# Altium PCB Copy of PCB1.PcbDoc (part 4 of 9)
Units mm, origin at the board's own origin, x right, y up, seen from the top; angles counter-clockwise.
Board outline 100 x 100 mm, 6 copper layers (Top Layer, Int1 (GND), Int2 (Sign), Int3 (Sign), Int4 (PWR), Bottom Layer), stack 1.538 mm thick; 614 components, 712 nets, 3013 pads, 501 vias.
Unrouted connection lines stored in the file: 259.
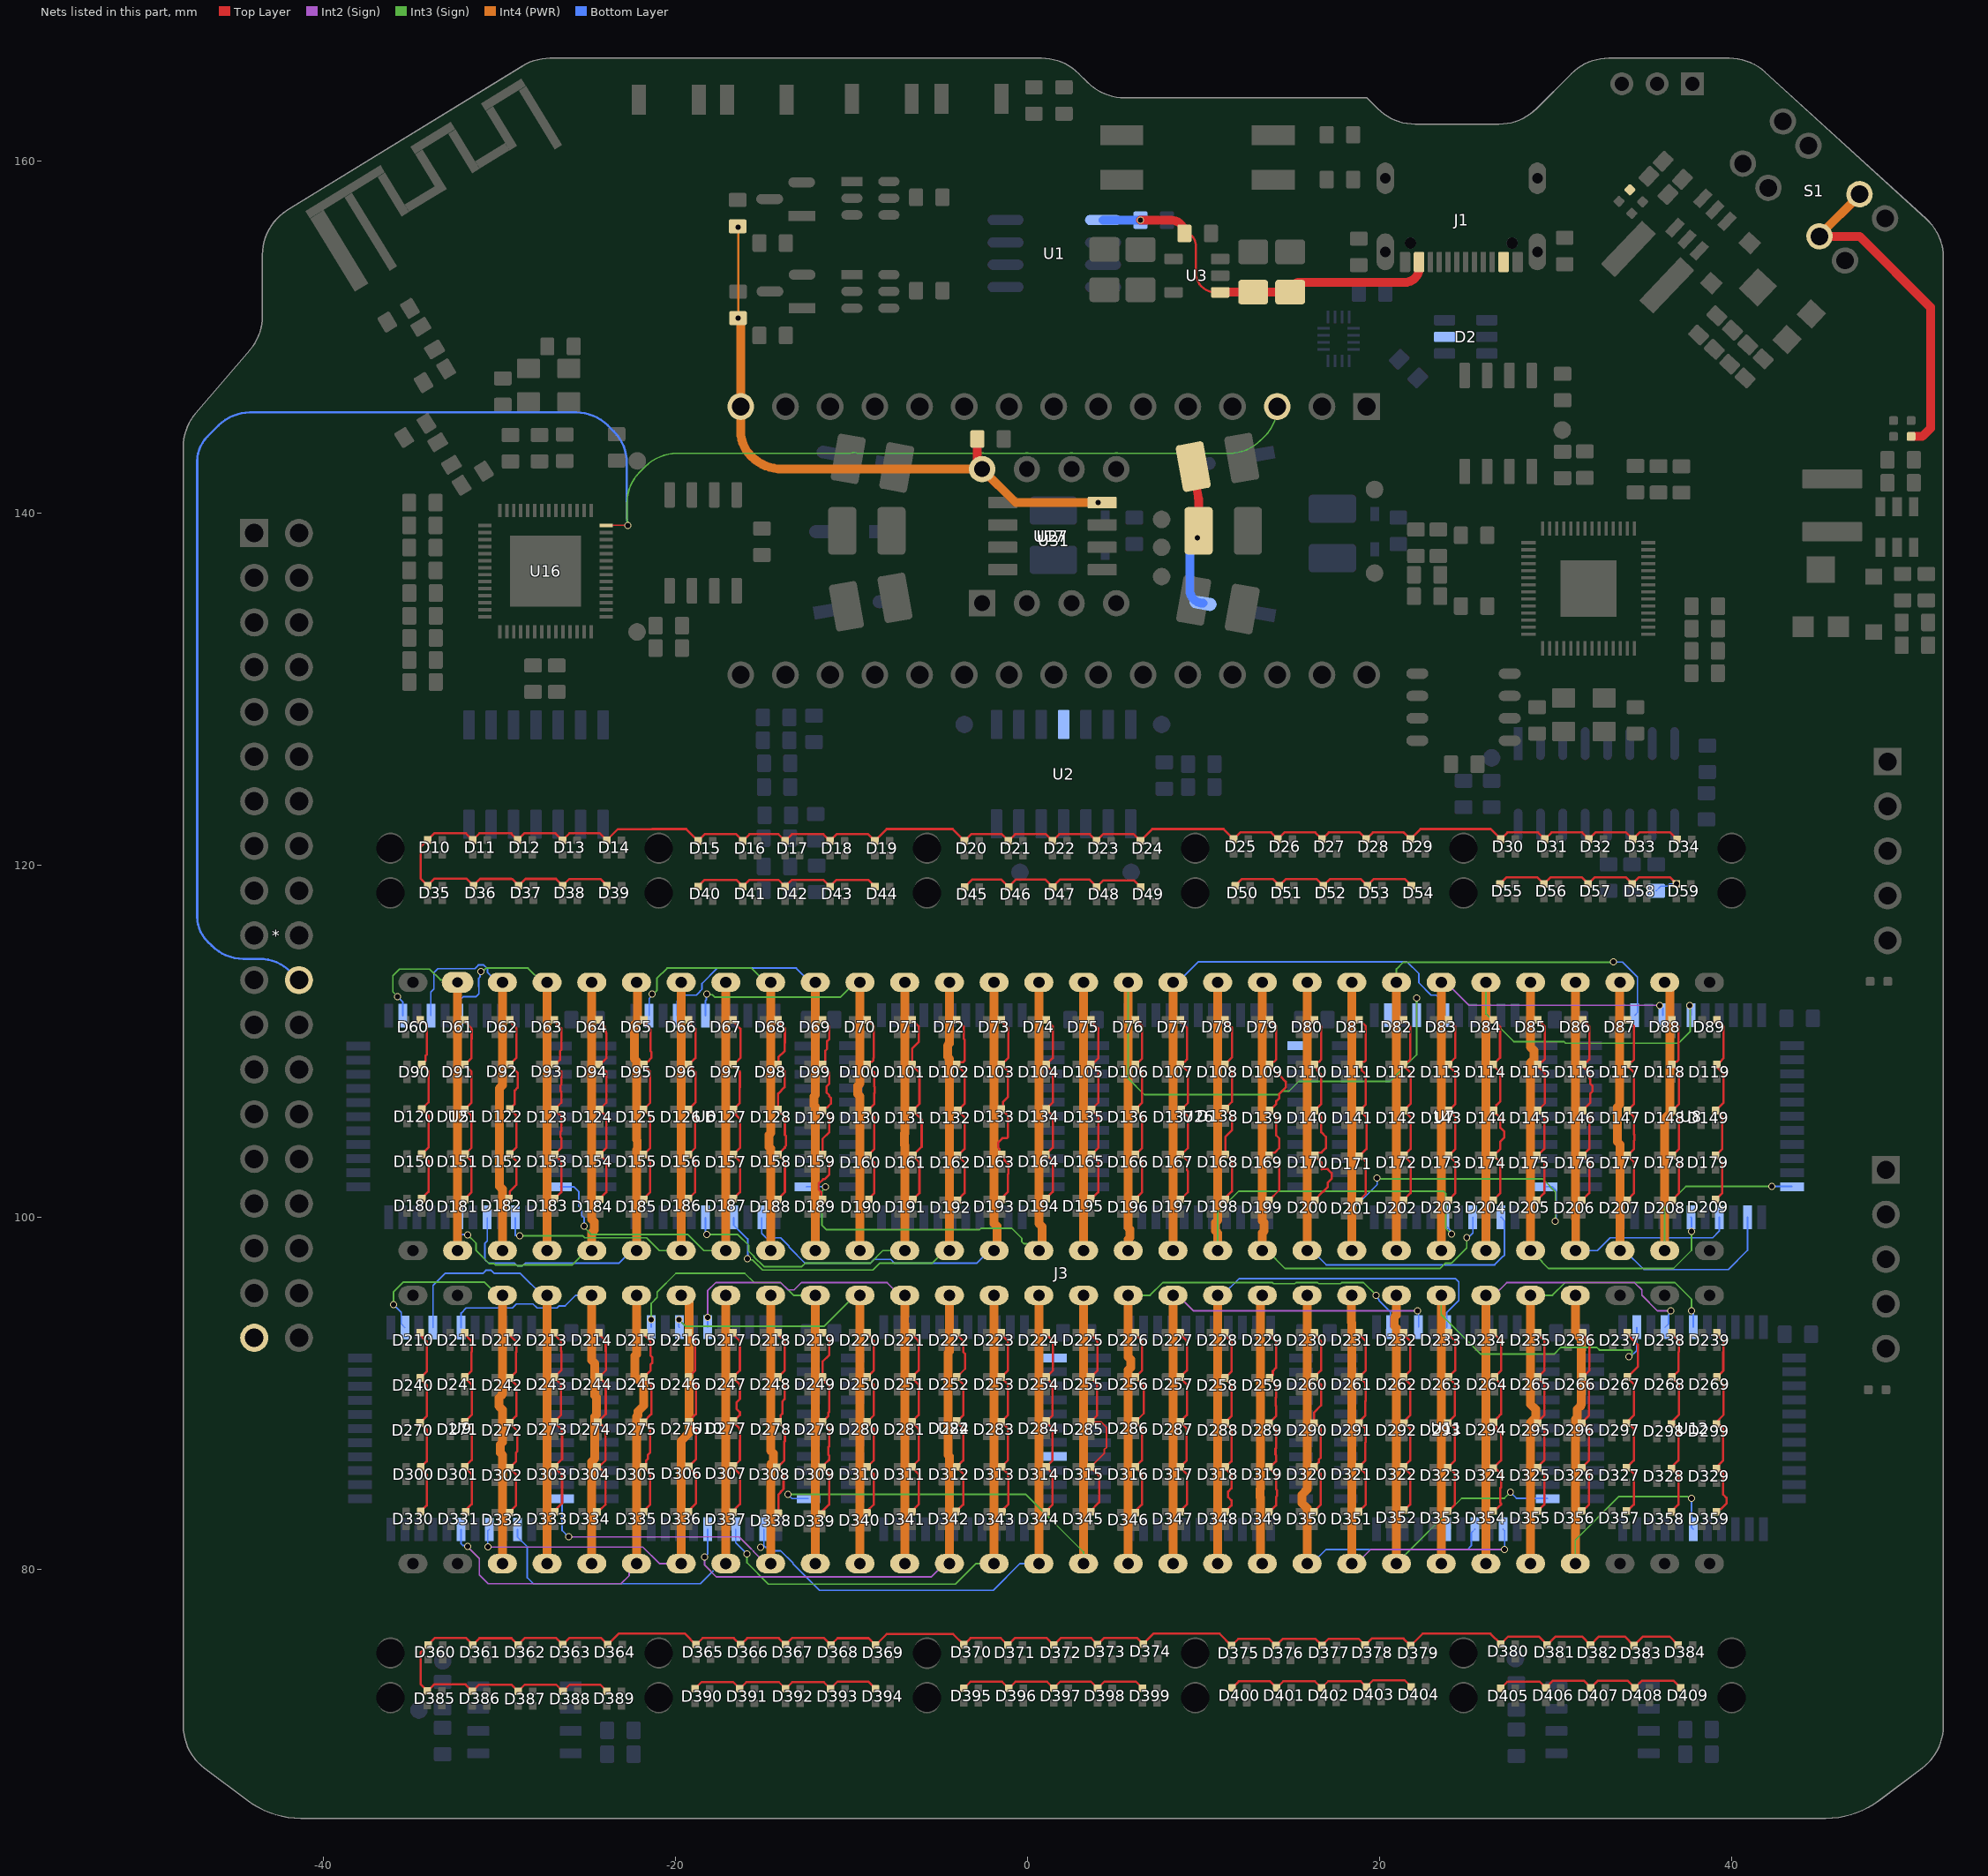
[diagram p7: the nets of this part, all layers, seen from the top]

## Via types
v1: diameter 0.4, hole 0.3, Top Layer to Bottom Layer, tented both sides, 494 vias
v2: diameter 0.4, hole 0.3, Top Layer to Bottom Layer, 5 vias
v3: diameter 0.4, hole 0.3, Top Layer to Bottom Layer, tented top, 1 vias
v4: diameter 0.6, hole 0.5, Top Layer to Bottom Layer, 1 vias

## Nets (pads, with @x,y where several pads share a name; then routed paths per layer and width w, separated by ;. In a path a pad name is that pad's centre, name@x,y a point inside that pad or via, vN(x,y) a via of type N, cw(c..) or ccw(c..) an arc to the next point about the centre after c; other vN are vias at no path point) (continued)
ANALOG_5V: *.37 C1.2 C2.2 C20.2 C21.2 C45.2 D2.5 D5.2 D10.2 D11.2 D12.2 D13.2 D14.2 D15.2 D16.2 D17.2 D18.2 D19.2 D20.2 D21.2 D22.2 D23.2 D24.2 D25.2 D26.2 D27.2 D28.2 D29.2 D30.2 D31.2 D32.2 D33.2 D34.2 D35.2 D36.2 D37.2 D38.2 D39.2 D40.2 D41.2 D42.2 D43.2 D44.2 D45.2 D46.2 D47.2 D48.2 D49.2 D50.2 D51.2 D52.2 D53.2 D54.2 D55.2 D56.2 D57.2 D58.2 D59.2 D60.2 D61.2 D62.2 D63.2 D64.2 D65.2 D66.2 D67.2 D68.2 D69.2 D70.2 D71.2 D72.2 D73.2 D74.2 D75.2 D76.2 D77.2 D78.2 D79.2 D80.2 D81.2 D82.2 D83.2 D84.2 D85.2 D86.2 D87.2 D88.2 D89.2 D90.2 D91.2 D92.2 D93.2 D94.2 D95.2 D96.2 D97.2 D98.2 D99.2 D100.2 D101.2 D102.2 D103.2 D104.2 D105.2 D106.2 D107.2 D108.2 D109.2 D110.2 D111.2 D112.2 D113.2 D114.2 D115.2 D116.2 D117.2 D118.2 D119.2 D120.2 D121.2 D122.2 D123.2 D124.2 D125.2 D126.2 D127.2 D128.2 D129.2 D130.2 D131.2 D132.2 D133.2 D134.2 D135.2 D136.2 D137.2 D138.2 D139.2 D140.2 D141.2 D142.2 D143.2 D144.2 D145.2 D146.2 D147.2 D148.2 D149.2 D150.2 D151.2 D152.2 D153.2 D154.2 D155.2 D156.2 D157.2 D158.2 D159.2 D160.2 D161.2 D162.2 D163.2 D164.2 D165.2 D166.2 D167.2 D168.2 D169.2 D170.2 D171.2 D172.2 D173.2 D174.2 D175.2 D176.2 D177.2 D178.2 D179.2 D180.2 D181.2 D182.2 D183.2 D184.2 D185.2 D186.2 D187.2 D188.2 D189.2 D190.2 D191.2 D192.2 D193.2 D194.2 D195.2 D196.2 D197.2 D198.2 D199.2 D200.2 D201.2 D202.2 D203.2 D204.2 D205.2 D206.2 D207.2 D208.2 D209.2 D210.2 D211.2 D212.2 D213.2 D214.2 D215.2 D216.2 D217.2 D218.2 D219.2 D220.2 D221.2 D222.2 D223.2 D224.2 D225.2 D226.2 D227.2 D228.2 D229.2 D230.2 D231.2 D232.2 D233.2 D234.2 D235.2 D236.2 D237.2 D238.2 D239.2 D240.2 D241.2 D242.2 D243.2 D244.2 D245.2 D246.2 D247.2 D248.2 D249.2 D250.2 D251.2 D252.2 D253.2 D254.2 D255.2 D256.2 D257.2 D258.2 D259.2 D260.2 D261.2 D262.2 D263.2 D264.2 D265.2 D266.2 D267.2 D268.2 D269.2 D270.2 D271.2 D272.2 D273.2 D274.2 D275.2 D276.2 D277.2 D278.2 D279.2 D280.2 D281.2 D282.2 D283.2 D284.2 D285.2 D286.2 D287.2 D288.2 D289.2 D290.2 D291.2 D292.2 D293.2 D294.2 D295.2 D296.2 D297.2 D298.2 D299.2 D300.2 D301.2 D302.2 D303.2 D304.2 D305.2 D306.2 D307.2 D308.2 D309.2 D310.2 D311.2 D312.2 D313.2 D314.2 D315.2 D316.2 D317.2 D318.2 D319.2 D320.2 D321.2 D322.2 D323.2 D324.2 D325.2 D326.2 D327.2 D328.2 D329.2 D330.2 D331.2 D332.2 D333.2 D334.2 D335.2 D336.2 D337.2 D338.2 D339.2 D340.2 D341.2 D342.2 D343.2 D344.2 D345.2 D346.2 D347.2 D348.2 D349.2 D350.2 D351.2 D352.2 D353.2 D354.2 D355.2 D356.2 D357.2 D358.2 D359.2 D360.2 D361.2 D362.2 D363.2 D364.2 D365.2 D366.2 D367.2 D368.2 D369.2 D370.2 D371.2 D372.2 D373.2 D374.2 D375.2 D376.2 D377.2 D378.2 D379.2 D380.2 D381.2 D382.2 D383.2 D384.2 D385.2 D386.2 D387.2 D388.2 D389.2 D390.2 D391.2 D392.2 D393.2 D394.2 D395.2 D396.2 D397.2 D398.2 D399.2 D400.2 D401.2 D402.2 D403.2 D404.2 D405.2 D406.2 D407.2 D408.2 D409.2 J1.A4B9 J1.B4A9 JP2.2 JP4.2 R4.1 R12.1 R26.2 R48.1 R50.1 S1.2 S1.6 U1.1 U2.4 U3.1 U17.8 U24.1 U26.1 U27.8 U31.15 | length 1060
  Top Layer w0.09: R50.1@-16.462,151.094 v1(-16.448,151.094) ; D315.2@3.583,85.823 4.34,86.58 4.34,86.803 4.478,86.941 4.478,88.056 4.15,88.383 D285.2@3.583,88.383
  Top Layer w0.127: D210.2@-34.617,93.406 -34.152,92.94 -34.152,92.898 -34.139,92.885 -34.139,92.357 -34.152,92.344 -34.152,91.236 -34.53,90.858 -34.152,90.479 -34.152,88.711 D270.2@-34.53,88.333 -34.152,87.954 -34.152,86.146 -34.53,85.768 -34.152,85.389 -34.152,83.636 D330.2@-34.53,83.258 ; D60.2@-34.517,111.231 -34.139,110.852 -34.139,109.26 -34.226,109.173 -34.226,108.888 D90.2@-34.43,108.683 -34.052,108.304 -34.052,106.536 D120.2@-34.43,106.158 -34.052,105.779 -34.052,103.971 D150.2@-34.43,103.593 -34.052,103.214 -34.052,101.461 D180.2@-34.43,101.083 ; D211.2@-32.077,93.456 -31.592,92.971 -31.592,92.363 -31.605,92.35 -31.605,91.293 -31.99,90.908 -31.592,90.51 -31.592,88.781 -31.99,88.383 -31.592,87.985 -31.592,86.216 -31.99,85.818 -31.592,85.42 -31.592,83.706 D331.2@-31.99,83.308 ; D61.2@-32.067,111.216 -31.602,110.75 -31.602,110.668 -31.599,110.665 -31.599,110.137 -31.602,110.134 -31.602,109.046 -31.98,108.668 -31.602,108.289 -31.602,106.521 D121.2@-31.98,106.143 -31.602,105.764 -31.602,103.956 -31.98,103.578 -31.602,103.199 -31.602,101.446 D181.2@-31.98,101.068 ; D212.2@-29.537,93.406 -29.072,92.94 -29.072,92.898 -29.059,92.885 -29.059,92.357 -29.072,92.344 -29.072,91.236 -29.45,90.858 -29.076,90.483 -29.076,90.334 -29.059,90.317 -29.059,88.724 -29.45,88.333 -29.007,87.889 -29.007,86.705 -29.072,86.64 -29.072,86.146 -29.45,85.768 -29.072,85.389 -29.072,83.636 D332.2@-29.45,83.258 ; D62.2@-29.528,111.231 -29.062,110.765 -29.062,110.668 -29.059,110.665 -29.059,110.137 -29.062,110.134 -29.062,109.061 -29.441,108.683 -28.982,108.224 -28.982,107.375 -29.152,107.205 -29.152,106.446 D122.2@-29.441,106.158 -29.071,105.788 -29.071,105.601 -29.062,105.592 -29.062,103.971 -29.441,103.593 D152.2@-29.437,103.593 -29.057,103.212 -29.057,101.851 -29.164,101.744 ; D182.2@-29.441,101.083 -29.422,101.101 -29.422,101.486 -29.164,101.744 ; D213.2@-26.997,93.456 -26.532,92.99 -26.532,92.948 -26.519,92.935 -26.519,92.407 -26.506,92.394 -26.506,91.312 -26.91,90.908 -26.532,90.529 -26.532,88.761 -26.91,88.383 -26.46,87.933 -26.46,86.268 -26.91,85.818 -26.46,85.368 -26.46,83.758 D333.2@-26.91,83.308 ; D63.2@-26.967,111.206 -26.502,110.74 -26.502,109.519 -26.583,109.438 -26.583,108.955 -26.88,108.658 -26.502,108.279 -26.502,107.531 -26.538,107.495 -26.538,107.171 -26.502,107.135 -26.502,106.511 D123.2@-26.88,106.133 -26.502,105.754 -26.502,104.908 -26.538,104.872 -26.538,104.548 -26.502,104.512 -26.502,103.946 -26.88,103.568 -26.502,103.189 -26.502,101.436 D183.2@-26.88,101.058 ; D214.2@-24.457,93.456 -23.992,92.99 -23.992,92.948 -23.979,92.935 -23.979,92.407 -23.966,92.394 -23.966,91.312 -24.37,90.908 -24.332,90.908 -23.979,90.554 -23.979,88.824 -24.37,88.433 -24.37,88.383 -23.992,88.004 -23.992,86.196 -24.37,85.818 -24.086,85.533 -24.086,85.381 -23.992,85.287 -23.992,83.686 D334.2@-24.37,83.308 ; D64.2@-24.417,111.206 -24.049,110.837 -24.049,110.734 -23.979,110.665 -23.979,110.494 -23.952,110.467 -23.952,109.036 -24.33,108.658 -23.952,108.279 -23.952,106.511 D124.2@-24.33,106.133 -23.952,105.754 -23.952,103.946 -24.33,103.568 -23.952,103.189 -23.952,101.436 D184.2@-24.33,101.058 ; D389.2@-23.91,73.081 -24.281,73.451 -26.032,73.451 D388.2@-26.41,73.073 -26.789,73.451 -28.582,73.451 D387.2@-28.96,73.073 -29.347,73.459 -31.182,73.459 D386.2@-31.56,73.081 -31.95,73.47 -33.733,73.47 D385.2@-34.111,73.092 -34.49,73.47 -34.49,75.292 D360.2@-34.07,75.712 -33.672,76.11 -31.922,76.11 D361.2@-31.528,75.716 -31.15,76.095 -29.339,76.095 D362.2@-28.96,75.716 -28.567,76.11 -26.808,76.11 D363.2@-26.42,75.723 -26.033,76.11 -24.258,76.11 D364.2@-23.87,75.723 -23.247,76.346 -19.477,76.346 D365.2@-18.856,75.726 -18.478,76.104 -16.702,76.104 D366.2@-16.32,75.723 -15.942,76.101 -14.149,76.101 D367.2@-13.77,75.723 -13.392,76.101 -11.571,76.101 D368.2@-11.185,75.715 -10.806,76.094 -9.043,76.094 D369.2@-8.65,75.7 -8.016,76.334 -4.245,76.334 D370.2@-3.629,75.718 -3.25,76.096 -1.53,76.096 D371.2@-1.132,75.698 -0.733,76.096 1.079,76.096 D372.2@1.475,75.7 1.871,76.096 3.606,76.096 D373.2@3.964,75.739 4.342,76.117 6.208,76.117 D374.2@6.559,75.766 7.14,76.346 10.901,76.346 D375.2@11.576,75.671 11.955,76.049 13.718,76.049 D376.2@14.096,75.671 14.475,76.049 16.351,76.049 D377.2@16.715,75.685 17.093,76.064 18.797,76.064 D378.2@19.16,75.7 19.539,76.079 21.349,76.079 D379.2@21.757,75.671 22.432,76.346 26.287,76.346 D380.2@26.873,75.761 27.297,76.185 29.04,76.185 D381.2@29.51,75.715 29.98,76.185 31.485,76.185 D382.2@31.97,75.7 32.455,76.185 33.915,76.185 D383.2@34.43,75.67 34.945,76.185 36.47,76.185 D384.2@36.94,75.716 ; D39.2@-23.906,118.851 -24.285,119.229 -26.048,119.229 D38.2@-26.426,118.851 -26.809,119.234 -28.541,119.234 D37.2@-28.919,118.855 -29.294,119.229 -29.339,119.229 -29.344,119.234 -31.116,119.234 D36.2@-31.495,118.855 -31.89,119.25 -33.701,119.25 D35.2@-34.1,118.851 -34.5,119.25 -34.5,121.041 D10.2@-34.1,121.441 -33.722,121.819 -31.916,121.819 D11.2@-31.537,121.441 -31.159,121.819 -29.339,121.819 -29.339,121.793 D12.2@-28.987,121.441 -28.609,121.819 -26.826,121.819 D13.2@-26.437,121.43 -26.048,121.819 -24.306,121.819 D14.2@-23.917,121.43 -23.292,122.055 -21.356,122.055 -21.345,122.066 -19.413,122.066 D15.2@-18.737,121.391 -18.359,121.769 -16.566,121.769 D16.2@-16.187,121.391 -15.809,121.769 -14.166,121.769 D17.2@-13.787,121.391 -13.409,121.769 -11.616,121.769 D18.2@-11.237,121.391 -10.859,121.769 -9.066,121.769 D19.2@-8.687,121.391 -8.012,122.066 -4.273,122.066 D20.2@-3.597,121.391 -3.219,121.769 -1.476,121.769 D21.2@-1.097,121.391 -0.719,121.769 1.027,121.769 D22.2@1.406,121.391 1.784,121.769 3.524,121.769 D23.2@3.903,121.391 4.281,121.769 6.024,121.769 D24.2@6.403,121.391 7.078,122.066 11.117,122.066 D25.2@11.693,121.491 12.071,121.869 13.827,121.869 D26.2@14.205,121.491 14.584,121.869 16.339,121.869 D27.2@16.718,121.491 17.096,121.869 18.852,121.869 D28.2@19.23,121.491 19.609,121.869 21.351,121.869 21.36,121.86 21.373,121.86 D29.2@21.743,121.491 22.318,122.066 26.3,122.066 D30.2@26.875,121.491 27.254,121.87 28.997,121.87 D31.2@29.375,121.491 29.754,121.87 31.497,121.87 D32.2@31.875,121.491 32.254,121.87 33.997,121.87 D33.2@34.375,121.491 34.754,121.87 36.499,121.87 D34.2@36.886,121.483 ; D215.2@-21.917,93.456 -21.452,92.99 -21.452,92.948 -21.439,92.935 -21.439,92.407 -21.426,92.394 -21.426,92.14 -21.346,92.06 -21.346,91.736 -21.426,91.656 -21.426,91.312 -21.83,90.908 -21.666,90.743 -21.666,90.722 -21.437,90.494 -21.416,90.494 -21.395,90.473 -21.395,88.818 -21.83,88.383 -21.452,88.004 -21.452,86.642 -21.579,86.515 -21.579,86.292 -21.679,86.192 -21.679,85.969 -21.83,85.818 -21.452,85.439 -21.452,83.686 D335.2@-21.83,83.308 ; D65.2@-21.917,111.206 -21.513,110.801 -21.513,110.739 -21.439,110.665 -21.439,109.454 -21.379,109.395 -21.379,109.071 -21.608,108.842 -21.666,108.842 D95.2@-21.817,108.691 -21.83,108.678 -21.83,108.658 -21.452,108.279 -21.452,106.511 D125.2@-21.83,106.133 -21.452,105.754 -21.452,103.946 -21.83,103.568 -21.452,103.189 -21.452,101.436 D185.2@-21.83,101.058 ; D216.2@-19.377,93.456 -18.912,92.99 -18.912,92.948 -18.899,92.935 -18.899,91.299 -19.29,90.908 -18.855,90.473 -18.855,88.818 -19.29,88.383 -18.855,87.947 -18.855,86.253 -19.29,85.818 -18.855,85.383 -18.855,83.743 D336.2@-19.29,83.308 ; D66.2@-19.367,111.206 -18.885,110.724 -18.885,109.053 -19.28,108.658 -18.885,108.263 -18.885,106.528 D126.2@-19.28,106.133 -18.902,105.754 -18.902,103.946 -19.28,103.568 -18.902,103.189 -18.902,101.436 D186.2@-19.28,101.058 ; D390.2@-18.91,73.223 -18.532,73.601 -16.739,73.601 D391.2@-16.36,73.223 -15.982,73.601 -14.139,73.601 D392.2@-13.76,73.223 -13.382,73.601 -11.589,73.601 D393.2@-11.21,73.223 -10.806,73.627 -9.065,73.627 D394.2@-8.66,73.223 ; D40.2@-18.737,118.801 -18.359,119.179 -16.566,119.179 D41.2@-16.187,118.801 -15.809,119.179 -14.166,119.179 D42.2@-13.787,118.801 -13.409,119.179 -11.616,119.179 D43.2@-11.237,118.801 -10.859,119.179 -9.066,119.179 D44.2@-8.687,118.801 ; D217.2@-16.837,93.456 -16.372,92.99 -16.372,92.948 -16.359,92.935 -16.359,91.299 -16.75,90.908 -16.359,90.516 -16.359,89.681 -16.555,89.485 -16.555,89.135 -16.359,88.939 -16.359,88.774 -16.75,88.383 -16.359,87.991 -16.359,87.874 -16.352,87.867 -16.352,87.339 -16.359,87.332 -16.359,86.209 -16.75,85.818 -16.352,85.419 -16.352,83.706 D337.2@-16.75,83.308 ; D67.2@-16.817,111.206 -16.324,110.713 -16.324,109.064 -16.546,108.842 -16.586,108.842 -16.73,108.698 -16.73,108.658 -16.377,108.304 -16.377,108.269 -16.359,108.251 -16.359,107.395 -16.363,107.391 -16.363,106.5 D127.2@-16.73,106.133 -16.579,105.981 -16.579,105.819 -16.352,105.592 -16.352,103.946 -16.73,103.568 -16.352,103.189 -16.352,103.008 -16.347,103.003 -16.347,102.476 -16.352,102.471 -16.352,101.436 D187.2@-16.73,101.058 ; D218.2@-14.297,93.456 -13.832,92.99 -13.832,92.948 -13.819,92.935 -13.819,92.407 -13.806,92.394 -13.806,91.312 -14.21,90.908 -14.172,90.908 -13.819,90.554 -13.819,90.367 -13.819,89.672 -13.951,89.54 -13.951,88.845 -14.029,88.767 -14.029,88.534 D278.2@-14.18,88.383 -13.884,88.087 -13.884,87.899 -13.802,87.817 -13.802,87.289 -13.832,87.259 -13.832,86.196 -14.21,85.818 -14.21,85.765 -13.876,85.431 -13.876,84.573 -14.028,84.422 -14.028,84.386 -14.176,84.239 -14.176,83.345 -14.21,83.31 D338.2@-14.21,83.308 ; D68.2@-14.267,111.206 -13.802,110.74 -13.802,109.916 -13.824,109.895 -13.824,109.44 -14.168,109.096 -14.168,108.661 -13.819,108.312 -13.819,107.395 -14.18,107.034 D128.2@-14.18,106.133 -14.029,105.981 -14.029,105.916 -13.802,105.689 -13.802,104.685 -13.734,104.618 -13.734,104.083 -13.802,104.015 -13.802,103.961 D158.2@-14.18,103.583 -14.18,103.568 -13.802,103.189 -13.802,101.436 D188.2@-14.18,101.058 ; D339.2@-11.67,83.308 -11.292,83.686 -11.292,85.439 -11.293,85.44 -11.303,85.44 -11.531,85.669 -11.531,85.679 -11.67,85.818 -11.531,85.957 -11.531,85.993 -11.303,86.221 -11.279,86.221 -11.279,86.466 -11.323,86.51 -11.323,86.957 -11.279,87.001 -11.279,87.991 -11.67,88.383 -11.323,88.73 -11.323,88.917 -11.292,88.948 -11.292,89.826 -11.279,89.839 -11.279,90.372 -11.378,90.472 -11.378,90.506 -11.506,90.634 -11.506,90.781 D249.2@-11.657,90.933 -11.657,91.813 -11.279,92.192 -11.279,93.072 D219.2@-11.657,93.451 ; D69.2@-11.657,111.231 -11.275,110.849 -11.275,110.384 -11.279,110.38 -11.279,110.137 -11.404,110.012 -11.404,109.571 -11.506,109.469 -11.506,108.842 -11.654,108.694 -11.654,108.599 -11.318,108.263 ; D189.2@-11.654,100.999 -11.737,101.082 -11.737,101.438 -11.886,101.586 -11.886,101.91 -11.621,102.174 -11.54,102.174 -11.275,102.438 -11.275,103.13 -11.657,103.512 -11.657,104.467 -11.275,104.849 -11.275,105.695 D129.2@-11.654,106.074 -11.492,106.235 -11.414,106.235 -11.185,106.464 -11.185,106.787 -11.275,106.877 -11.275,106.939 -11.44,107.104 -11.44,107.428 -11.275,107.593 -11.275,108.087 ccw(c-11.402,108.087) -11.277,108.106 cw(c-10.891,108.166) -11.281,108.171 ccw(c-11.408,108.174) -11.318,108.263 ; D220.2@-9.217,93.456 -8.752,92.99 -8.752,92.948 -8.739,92.935 -8.739,91.299 -9.13,90.908 -8.752,90.529 -8.752,88.761 D280.2@-9.13,88.383 -8.752,88.004 -8.752,86.196 -9.13,85.818 -8.752,85.439 -8.752,83.686 D340.2@-9.13,83.308 ; D70.2@-9.117,111.231 -8.739,110.852 -8.739,109.079 -8.774,109.044 -8.774,108.919 -8.851,108.842 -8.966,108.842 -9.094,108.714 -9.094,108.599 -8.716,108.22 -8.716,107.432 -8.69,107.407 -8.69,107.083 -8.716,107.057 -8.716,106.452 D130.2@-9.094,106.074 -8.716,105.695 -8.716,103.887 -9.094,103.509 -8.716,103.13 -8.716,101.377 D190.2@-9.094,100.999 ; D221.2@-6.677,93.456 -6.212,92.99 -6.212,92.948 -6.199,92.935 -6.199,91.299 -6.59,90.908 -6.199,90.516 -6.199,88.774 -6.59,88.383 -6.217,88.009 -6.217,87.984 -6.199,87.966 -6.199,86.209 -6.59,85.818 -6.199,85.426 -6.199,83.699 D341.2@-6.59,83.308 ; D71.2@-6.577,111.231 -6.199,110.852 -6.199,109.961 -6.577,109.582 -6.577,108.77 -6.535,108.728 -6.535,108.599 -6.156,108.22 -6.156,106.452 D131.2@-6.535,106.074 -6.03,105.569 -6.03,104.013 -6.535,103.509 -6.156,103.13 -6.156,101.377 D191.2@-6.535,100.999 ; D222.2@-4.137,93.456 -3.672,92.99 -3.672,92.948 -3.659,92.935 -3.659,92.339 -3.561,92.241 -3.561,91.398 -4.05,90.908 -3.659,90.516 -3.659,88.774 -4.05,88.383 -3.672,88.004 -3.672,86.196 -4.05,85.818 -3.672,85.439 -3.672,83.686 D342.2@-4.05,83.308 ; D72.2@-4.037,111.231 -3.646,110.84 -3.646,110.149 -3.593,110.096 -3.593,108.901 -3.667,108.827 -3.886,108.827 -3.975,108.738 -3.975,108.599 -3.597,108.22 -3.597,106.452 D132.2@-3.975,106.074 -3.597,105.695 -3.597,103.887 -3.975,103.509 -3.597,103.13 -3.597,101.377 D192.2@-3.975,100.999 ; D395.2@-3.63,73.246 -3.252,73.624 -1.459,73.624 D396.2@-1.08,73.246 -0.702,73.624 1.091,73.624 D397.2@1.47,73.246 1.848,73.624 3.591,73.624 D398.2@3.97,73.246 4.348,73.624 6.141,73.624 D399.2@6.52,73.246 ; D45.2@-3.584,118.779 -3.158,119.205 -1.511,119.205 D46.2@-1.084,118.779 -0.658,119.205 0.989,119.205 D47.2@1.416,118.779 1.842,119.205 3.489,119.205 D48.2@3.916,118.779 4.294,119.157 6.037,119.157 D49.2@6.416,118.779 ; D223.2@-1.597,93.456 -1.132,92.99 -1.132,92.948 -1.119,92.935 -1.119,91.299 -1.51,90.908 -1.119,90.516 -1.119,88.774 -1.51,88.383 -1.119,87.991 -1.119,86.209 -1.51,85.818 -1.119,85.426 -1.119,85.274 -1.102,85.257 -1.102,83.716 D343.2@-1.51,83.308 ; D73.2@-1.584,111.224 -1.113,110.752 -1.113,109.06 -1.497,108.676 -1.119,108.297 -1.119,106.855 -1.417,106.556 -1.417,106.231 D133.2@-1.497,106.151 -1.119,105.772 -1.119,104.579 -1.193,104.505 -1.444,104.505 -1.673,104.276 -1.673,103.953 -1.6,103.88 -1.6,103.688 -1.497,103.586 D163.2@-1.493,103.586 ; D193.2@-1.497,101.076 -1.119,101.454 -1.119,102.462 -1.102,102.479 -1.102,103.007 -1.329,103.234 -1.329,103.421 D163.2@-1.48,103.573 ; D224.2@0.943,93.456 1.408,92.99 1.408,92.948 1.421,92.935 1.421,92.407 1.434,92.394 1.434,91.312 1.03,90.908 1.408,90.529 1.408,88.761 1.03,88.383 1.408,88.004 1.408,86.196 1.03,85.818 1.408,85.439 1.408,83.686 D344.2@1.03,83.308 ; D194.2@1.043,101.076 1.421,101.454 1.421,103.207 1.043,103.586 1.421,103.964 1.421,105.772 D134.2@1.043,106.151 1.421,106.529 1.421,108.297 1.043,108.676 1.421,109.054 1.421,110.852 D74.2@1.043,111.231 ; D225.2@3.47,93.456 3.935,92.99 3.935,92.948 3.948,92.935 3.948,92.898 3.961,92.885 3.961,91.312 3.557,90.908 3.935,90.529 3.935,88.761 D285.2@3.57,88.396 ; D75.2@3.533,111.206 3.998,110.74 3.998,109.036 3.62,108.658 3.998,108.279 3.998,106.511 D135.2@3.62,106.133 3.998,105.754 3.998,103.946 3.62,103.568 3.998,103.189 3.998,101.436 D195.2@3.62,101.058 ; D345.2@3.557,83.308 4.055,83.806 4.055,85.32 D315.2@3.567,85.807 ; D226.2@6.02,93.456 6.485,92.99 6.485,92.948 6.498,92.935 6.498,92.888 6.501,92.885 6.501,92.357 6.498,92.354 6.498,91.299 6.107,90.908 6.59,90.425 6.59,88.866 6.107,88.383 6.485,88.004 6.485,86.196 6.107,85.818 6.485,85.439 6.485,83.686 D346.2@6.107,83.308 ; D196.2@6.12,101.058 6.498,101.436 6.498,103.189 6.12,103.568 6.498,103.946 6.498,105.754 D136.2@6.12,106.133 6.501,106.514 6.501,108.276 6.12,108.658 6.498,109.036 6.498,110.134 6.501,110.137 6.501,110.852 D76.2@6.123,111.231 ; D227.2@8.563,93.456 9.028,92.99 9.028,92.948 9.041,92.935 9.041,91.299 8.65,90.908 9.041,90.516 9.041,88.774 8.65,88.383 9.028,88.004 9.028,86.196 8.65,85.818 9.041,85.426 9.041,85.264 9.048,85.257 9.048,84.729 9.041,84.722 9.041,83.699 D347.2@8.65,83.308 ; D77.2@8.633,111.196 9.045,110.784 9.045,108.973 8.914,108.842 8.814,108.842 8.72,108.748 8.72,108.648 9.098,108.269 9.098,106.501 D137.2@8.72,106.123 9.098,105.744 9.098,103.936 8.72,103.558 9.098,103.179 9.098,103.056 9.043,103.001 9.043,102.677 9.098,102.622 9.098,101.426 D197.2@8.72,101.048 ; R4.1@8.905,155.908 cw(c8.905,155.272) 9.54,155.272 9.54,153.69 ccw(c10.672,153.69) 10.672,152.558 U3.1@10.93,152.558 ; D228.2@11.103,93.406 11.568,92.94 11.568,92.898 11.581,92.885 11.581,92.357 11.568,92.344 11.568,91.236 11.19,90.858 11.581,90.466 11.581,88.724 11.19,88.333 11.568,87.954 11.568,86.146 11.19,85.768 11.568,85.389 11.568,84.61 11.385,84.427 11.385,84.103 11.568,83.92 11.568,83.636 D348.2@11.19,83.258 ; D78.2@11.133,111.256 11.598,110.79 11.598,109.086 11.22,108.708 11.598,108.329 11.598,106.561 D138.2@11.22,106.183 11.598,105.804 11.598,104.954 11.22,104.575 11.22,103.618 11.598,103.239 11.598,101.486 D198.2@11.22,101.108 ; D400.2@11.613,73.266 11.991,73.645 13.768,73.645 D401.2@14.14,73.273 14.511,73.645 14.604,73.645 14.611,73.651 16.311,73.651 D402.2@16.69,73.273 17.068,73.651 18.911,73.651 D403.2@19.24,73.323 19.618,73.701 21.411,73.701 D404.2@21.79,73.323 ; D50.2@11.793,118.851 12.171,119.229 13.914,119.229 D51.2@14.293,118.851 14.671,119.229 16.414,119.229 D52.2@16.793,118.851 17.171,119.229 18.914,119.229 D53.2@19.293,118.851 19.671,119.229 21.414,119.229 D54.2@21.793,118.851 ; D229.2@13.643,93.406 14.108,92.94 14.108,92.898 14.121,92.885 14.121,92.357 14.108,92.344 14.108,91.45 13.922,91.264 13.922,91.05 13.73,90.858 14.121,90.466 14.121,89.789 14.09,89.758 14.09,89.305 14.121,89.274 14.121,88.724 13.73,88.333 14.108,87.954 14.108,86.885 14.073,86.85 14.073,86.527 14.108,86.492 14.108,86.146 13.73,85.768 14.108,85.389 14.108,84.564 14.169,84.502 14.169,84.179 14.108,84.118 14.108,83.636 D349.2@13.73,83.258 ; D199.2@13.72,100.983 14.287,101.551 14.287,102.962 13.741,103.509 13.741,103.554 13.871,103.684 14.039,103.684 14.287,103.933 14.287,104.151 14.295,104.159 14.295,104.482 14.119,104.658 14.119,105.695 D139.2@13.741,106.074 14.121,106.454 14.121,106.603 14.295,106.777 14.295,107.026 14.652,107.382 14.652,107.713 14.32,108.044 14.295,108.044 13.741,108.599 13.741,108.689 D109.2@13.743,108.691 13.894,108.842 13.984,108.842 14.121,108.979 14.121,110.852 D79.2@13.743,111.231 ; D230.2@16.183,93.456 16.648,92.99 16.648,92.948 16.661,92.935 16.661,91.299 16.27,90.908 16.661,90.516 16.661,89.318 16.27,88.927 16.27,88.383 16.636,88.017 16.633,88.014 16.633,87.772 16.648,87.757 16.648,86.348 16.537,86.237 16.537,86.085 16.27,85.818 16.648,85.439 16.648,83.686 D350.2@16.27,83.308 ; D80.2@16.283,111.231 16.661,110.852 16.661,108.96 16.544,108.842 16.434,108.842 16.3,108.709 16.3,108.599 16.434,108.465 16.434,108.345 16.54,108.239 16.546,108.239 16.661,108.125 16.661,108.118 16.663,108.116 16.679,108.116 16.679,106.452 D140.2@16.3,106.074 16.679,105.695 16.679,104.839 16.934,104.583 16.934,103.933 16.686,103.684 16.471,103.684 D170.2@16.32,103.533 16.471,103.381 16.471,103.338 16.698,103.111 16.698,102.739 16.709,102.749 17.032,102.749 17.261,102.521 17.261,102.197 17.034,101.97 17.034,101.714 16.805,101.485 16.787,101.485 D200.2@16.3,100.999 ; D231.2@18.723,93.456 19.188,92.99 19.188,92.948 19.201,92.935 19.201,91.299 18.81,90.908 18.848,90.908 19.183,90.572 19.183,90.385 19.201,90.367 19.201,89.587 19.183,89.569 19.183,88.756 18.81,88.383 19.183,88.009 19.183,87.84 19.185,87.838 19.185,87.77 19.198,87.757 19.198,87.229 19.185,87.216 19.185,86.193 18.81,85.818 19.201,85.426 19.201,83.699 D351.2@18.81,83.308 ; D81.2@18.823,111.231 19.201,110.852 19.201,108.94 19.101,108.839 18.974,108.839 18.86,108.725 18.974,108.611 18.974,108.352 19.201,108.125 19.201,106.415 D141.2@18.86,106.074 19.238,105.695 19.238,103.887 18.86,103.509 19.238,103.13 19.238,103.058 19.198,103.018 19.198,101.337 D201.2@18.86,100.999 ; D232.2@21.263,93.456 21.728,92.99 21.728,92.948 21.741,92.935 21.741,91.299 21.35,90.908 21.741,90.516 21.741,88.774 21.35,88.383 21.728,88.004 21.728,86.196 21.35,85.818 21.728,85.439 21.728,83.686 D352.2@21.35,83.308 ; D82.2@21.363,111.231 21.661,110.933 21.661,110.931 21.741,110.85 21.741,108.985 21.599,108.842 21.514,108.842 21.369,108.697 21.369,108.599 21.748,108.22 21.748,106.452 D142.2@21.369,106.074 21.748,105.695 21.748,103.887 21.369,103.509 21.75,103.128 21.75,101.38 D202.2@21.369,100.999 ; D233.2@23.803,93.456 24.281,92.977 24.281,91.299 23.89,90.908 24.268,90.529 24.268,88.761 23.89,88.383 24.268,88.004 24.268,86.196 23.89,85.818 24.268,85.439 24.268,83.686 D353.2@23.89,83.308 ; D83.2@23.903,111.231 24.211,110.922 24.211,110.91 24.281,110.84 24.281,110.249 24.281,109.069 23.92,108.708 23.92,108.598 24.298,108.219 24.298,106.451 D143.2@23.92,106.073 24.298,105.694 24.298,103.886 23.92,103.508 24.298,103.129 24.298,101.376 D203.2@23.92,100.998 ; D234.2@26.42,93.456 26.885,92.99 26.885,92.948 26.898,92.935 26.898,92.407 26.885,92.394 26.885,91.286 26.507,90.908 26.885,90.529 26.885,88.818 26.677,88.61 26.677,88.583 26.507,88.413 26.507,88.383 26.607,88.283 26.607,88.022 26.834,87.795 26.834,87.772 26.885,87.721 26.885,86.196 26.507,85.818 26.885,85.439 26.885,84.665 26.84,84.62 26.84,83.798 26.885,83.753 26.885,83.686 D354.2@26.507,83.308 ; D114.2@26.443,108.691 26.832,109.08 26.832,110.722 26.839,110.729 26.839,110.834 D84.2@26.443,111.231 ; D204.2@26.47,100.998 26.848,101.376 26.848,103.129 26.47,103.508 26.848,103.886 26.848,104.314 27.075,104.541 27.075,104.864 26.848,105.091 26.848,105.636 26.621,105.863 26.621,105.921 D144.2@26.47,106.073 26.621,106.224 26.621,106.376 26.848,106.603 26.848,108.219 D114.2@26.47,108.598 ; D55.2@26.833,118.95 27.212,119.328 28.947,119.328 D56.2@29.325,118.95 29.704,119.328 31.459,119.328 D57.2@31.838,118.95 32.216,119.328 33.965,119.328 D58.2@34.343,118.95 34.722,119.328 36.472,119.328 v1(36.85,118.95) ; D405.2@26.87,73.248 27.249,73.626 29.086,73.626 D406.2@29.44,73.273 29.844,73.677 31.585,73.677 D407.2@31.99,73.273 32.394,73.677 34.085,73.677 D408.2@34.49,73.273 34.894,73.677 36.685,73.677 D409.2@37.09,73.273 ; D235.2@28.883,93.456 29.361,92.977 29.361,91.311 D265.2@28.983,90.933 28.97,90.92 28.97,90.908 29.361,90.516 29.361,88.774 28.97,88.383 29.348,88.004 29.348,86.196 28.97,85.818 29.348,85.439 29.348,83.686 D355.2@28.97,83.308 ; D205.2@28.97,100.998 29.348,101.376 29.348,103.129 28.97,103.508 29.348,103.886 29.348,105.694 D145.2@28.97,106.073 29.385,106.488 29.385,108.183 28.97,108.598 29.385,109.013 29.385,110.828 D85.2@28.983,111.231 ; D236.2@31.423,93.456 31.888,92.99 31.888,92.948 31.901,92.935 31.901,92.407 31.914,92.394 31.914,91.312 31.51,90.908 31.888,90.529 31.888,88.761 31.51,88.383 31.888,88.004 31.888,86.196 31.51,85.818 31.888,85.439 31.888,83.686 D356.2@31.51,83.308 ; D206.2@31.52,100.998 31.898,101.376 31.898,103.129 31.52,103.508 31.898,103.886 31.898,105.694 D146.2@31.52,106.073 31.952,106.505 31.952,107.034 32.075,107.157 32.075,107.481 31.952,107.604 31.952,107.863 31.901,107.914 31.901,108.125 31.843,108.183 31.843,108.274 31.52,108.598 31.52,108.688 D116.2@31.523,108.691 31.674,108.842 31.764,108.842 31.901,108.979 31.901,110.132 31.901,110.137 ; D86.2@31.523,111.231 31.901,110.852 31.901,110.137 ; D237.2@33.963,93.456 34.655,92.763 34.655,91.514 34.05,90.908 34.441,90.516 34.441,88.774 34.05,88.383 34.428,88.004 34.428,86.196 34.05,85.818 34.428,85.439 34.428,83.686 D357.2@34.05,83.308 ; D87.2@34.063,111.231 34.441,110.852 34.441,108.969 34.314,108.842 34.214,108.842 34.07,108.698 34.07,108.598 34.448,108.219 34.448,106.451 D147.2@34.07,106.073 34.448,105.694 34.448,104.716 34.46,104.704 34.46,104.38 34.448,104.368 34.448,103.886 34.07,103.508 34.448,103.129 34.448,101.376 D207.2@34.07,100.998 ; D238.2@36.503,93.456 36.988,92.971 36.988,92.363 36.975,92.35 36.975,91.293 36.59,90.908 37.005,90.493 37.005,88.798 36.59,88.383 36.968,88.004 36.968,86.196 36.59,85.818 36.968,85.439 36.968,83.686 D358.2@36.59,83.308 ; D88.2@36.603,111.231 36.911,110.922 36.911,110.904 36.981,110.834 36.981,108.959 36.864,108.842 36.754,108.842 36.62,108.708 36.62,108.598 36.998,108.219 36.998,106.451 D148.2@36.62,106.073 36.998,105.694 36.998,103.886 36.62,103.508 36.998,103.129 36.998,101.376 D208.2@36.62,100.998 ; D239.2@39.043,93.456 39.528,92.971 39.528,92.363 39.515,92.35 39.515,91.293 39.13,90.908 39.528,90.51 39.528,88.781 39.13,88.383 39.508,88.004 39.508,86.196 39.13,85.818 39.508,85.439 39.508,84.253 39.695,84.066 39.695,83.742 39.387,83.434 39.256,83.434 D359.2@39.13,83.308 ; D209.2@39.085,100.999 39.464,101.377 39.464,103.13 39.085,103.509 39.464,103.887 39.464,105.695 D149.2@39.085,106.074 39.521,106.509 39.521,108.163 39.085,108.599 39.085,108.634 D119.2@39.143,108.691 39.294,108.842 39.329,108.842 39.521,109.034 39.521,110.852 D89.2@39.143,111.231
  Top Layer w0.5: R12.1@-2.865,144.225 -2.865,143.053 -2.593,142.781 U17.8@-2.593,142.511 ; v1(6.405,156.658) 8.155,156.658 cw(c8.155,155.908) R4.1@8.905,155.908 ; C21.2@9.405,142.658 9.573,141.571 9.697,140.868 ; 9.697,140.867 cw(c9.205,140.781) 9.705,140.781 9.705,140.108 C20.2@9.705,139.008 ; U3.1@10.93,152.558 10.937,152.565 12.798,152.565 C2.2@12.805,152.572 C1.2@14.905,152.572 cw(c15.458,152.572) 15.458,153.126 21.431,153.126 ccw(c21.431,153.925) 22.23,153.925 J1.B4A9@22.231,154.285 ; S1.6@44.982,155.741 47.254,155.741 51.285,151.71 51.285,144.825 50.829,144.369 JP2.2@50.183,144.369
  Int4 (PWR) w0.127: v1(-16.448,151.094) v1(-16.448,156.269)
  Int4 (PWR) w0.5: v1(-16.448,151.094) -16.309,150.955 U31.15@-16.309,146.067 -16.309,144.655 ccw(c-14.329,144.655) -15.729,143.255 ccw(c-13.933,145.051) -13.933,142.511 U17.8@-2.593,142.511 -0.695,140.613 v1(4.005,140.613) ; S1.6@44.982,155.741 44.982,155.802 47.254,158.073 S1.2@47.254,158.135
  Bottom Layer w0.09: R26.2@35.705,118.558 35.97,118.823 36.34,118.823 36.467,118.95 v1(36.85,118.95)
  Bottom Layer w0.5: U1.1@4.275,156.668 4.275,156.658 v1(6.405,156.658) ; v1(9.645,138.615) ccw(c9.645,138.175) 9.205,138.175 9.205,135.649 ccw(c9.956,135.649) D5.2@9.956,134.898
AREF: *.22 U16.42 U24.8 U31.3 | length 106.8
  Top Layer w0.09: U16.42@-23.952,139.318 -23.949,139.321 -23.1,139.321 ; -23.099,139.321 v1(-22.72,139.324)
  Int3 (Sign) w0.09: v1(-22.72,139.324) -22.778,139.69 cw(c-22.689,139.704) -22.779,139.704 -22.779,140.56 cw(c-20.239,140.56) -22.035,142.356 -21.727,142.664 cw(c-19.931,140.868) -19.931,143.408 -10.098,143.408 ccw(c-10.098,143.498) -10.057,143.418 cw(c-9.885,143.088) -9.713,143.418 ccw(c-9.672,143.498) -9.672,143.408 -2.816,143.408 ccw(c-2.817,143.498) -2.798,143.41 cw(c-2.593,142.511) -2.389,143.41 ccw(c-2.37,143.498) -2.37,143.408 -0.276,143.408 ccw(c-0.277,143.498) -0.258,143.41 cw(c-0.053,142.511) 0.151,143.41 ccw(c0.17,143.498) 0.17,143.408 2.264,143.408 ccw(c2.263,143.498) 2.282,143.41 cw(c2.487,142.511) 2.691,143.41 ccw(c2.71,143.498) 2.71,143.408 4.804,143.408 ccw(c4.803,143.498) 4.822,143.41 cw(c5.027,142.511) 5.231,143.41 ccw(c5.25,143.498) 5.25,143.408 11.436,143.408 ccw(c11.436,145.948) 13.232,144.152 13.481,144.401 ccw(c11.814,146.067) U31.3@14.171,146.067
  Bottom Layer w0.127: *.22@-41.409,113.483 -41.878,113.951 ccw(c-43.674,112.155) -43.674,114.695 -44.57,114.695 cw(c-44.57,117.235) -46.366,115.439 -46.611,115.684 cw(c-45.213,117.082) -47.19,117.082 -47.19,142.965 cw(c-45.213,142.965) -46.611,144.363 -45.983,144.991 cw(c-44.187,143.195) -44.187,145.735 -25.654,145.735 cw(c-25.654,143.195) -23.858,144.991 -23.523,144.657 cw(c-25.319,142.861) -22.779,142.861 -22.779,139.778 ccw(c-22.652,139.778) -22.778,139.761 v1(-22.72,139.324)
B_B2: J3.2 U5.35 | length 21.9
  Int3 (Sign) w0.09: v3(-35.805,112.545) -36.075,112.815 -36.075,113.729 -35.696,114.108 -33.985,114.108 -33.375,113.498 -32.534,113.498 J3.2@-32.392,113.356
  Int4 (PWR) w0.5: J3.2@-32.392,98.116 J3.2@-32.392,113.356
  Bottom Layer w0.09: v3(-35.805,112.545) -35.513,112.253 U5.35@-35.513,111.468
B_B3: J3.3 U5.37 | length 22.5
  Int4 (PWR) w0.5: J3.3@-29.852,98.116 -29.852,101.602 -30.024,101.774 -30.024,107.34 -29.852,107.512 J3.3@-29.852,113.356
  Bottom Layer w0.09: U5.37@-33.913,111.468 -33.913,112.811 -33.745,112.978 -33.745,113.91 -33.519,114.136 -31.421,114.136 -31.218,114.339 -30.91,114.339 -30.692,114.121 -30.692,113.907 -30.141,113.356 J3.3@-29.852,113.356
B_B4: J3.4 U5.39 | length 22.9
  Int3 (Sign) w0.09: v1(-31.064,113.967) -30.986,113.967 -30.788,114.165 -28.397,114.165 -27.587,113.356 J3.4@-27.312,113.356
  Int4 (PWR) w0.5: J3.4@-27.312,98.116 J3.4@-27.312,113.356
  Bottom Layer w0.09: U5.39@-32.313,111.468 -32.313,112.299 -32.067,112.545 -31.345,112.545 -31.185,112.705 -31.185,113.1 -31.202,113.117 -31.202,113.587 -31.123,113.666 -31.123,113.907 v1(-31.064,113.967)
B_B5: J3.5 U5.17 | length 25.1
  Int3 (Sign) w0.09: v1(-31.815,99) -31.345,98.53 -31.345,98.116 -30.605,97.375 -30.328,97.375 -30.257,97.305 -29.062,97.305 -29.007,97.25 -28.699,97.25 -28.643,97.305 -25.87,97.305 -25.059,98.116 J3.5@-24.772,98.116
  Int4 (PWR) w0.5: J3.5@-24.772,98.116 -24.772,99.129 -24.631,99.271 -24.631,99.749 -24.772,99.891 J3.5@-24.772,113.356
  Bottom Layer w0.09: U5.17@-32.313,99.998 -32.313,99.2 -32.15,99.037 -31.853,99.037 v1(-31.815,99)
B_B6: J3.6 U5.15 | length 27
  Int4 (PWR) w0.5: J3.6@-22.232,98.116 -22.232,103.84 -22.186,103.886 -22.186,104.364 -22.232,104.41 -22.232,108.88 -22.347,108.994 -22.347,110.953 -22.18,111.119 -22.18,113.304 J3.6@-22.232,113.356
  Bottom Layer w0.09: U5.15@-30.713,99.998 -30.713,98.661 -30.849,98.524 -30.849,97.62 -30.623,97.394 -29.151,97.394 -29.007,97.25 -28.699,97.25 -28.555,97.394 -23.229,97.394 -22.507,98.116 J3.6@-22.232,98.116
B_B7: J3.7 U5.13 | length 26
  Int3 (Sign) w0.09: v1(-28.867,98.953) -25.278,98.953 -25.163,98.838 -21.658,98.838 -20.936,98.116 J3.7@-19.692,98.116
  Int4 (PWR) w0.5: J3.7@-19.692,98.116 J3.7@-19.692,113.356
  Bottom Layer w0.09: U5.13@-29.113,99.998 -29.113,98.969 -28.883,98.969 v1(-28.867,98.953)
B_B8: J3.8 U5.11 | length 27.2
  Int3 (Sign) w0.09: v1(-25.208,99.51) -25.208,99.452 -24.783,99.028 -19.308,99.028 -18.396,98.116 J3.8@-17.152,98.116
  Int4 (PWR) w0.5: J3.8@-17.152,98.116 -17.152,111.575 -17.163,111.585 -17.163,112.063 -17.152,112.074 J3.8@-17.152,113.356
  Bottom Layer w0.09: U5.11@-26.578,101.733 -25.775,101.733 -25.742,101.7 -25.514,101.472 -25.514,100.638 -25.349,100.474 -25.349,100.105 -25.208,99.963 v1(-25.208,99.51)
B_B9: J3.9 U6.35 | length 24.7
  Int3 (Sign) w0.09: v1(-21.344,112.694) -21.26,112.694 -21.077,112.877 -21.077,113.577 -20.489,114.165 -15.697,114.165 -14.887,113.356 J3.9@-14.612,113.356
  Int4 (PWR) w0.5: J3.9@-14.612,98.116 -14.612,103.916 -14.702,104.005 -14.702,104.695 -14.612,104.785 J3.9@-14.612,113.356
  Bottom Layer w0.09: U6.35@-21.513,111.468 -21.513,112.441 -21.344,112.61 v1(-21.344,112.694)
B_B10: J3.10 U6.37 | length 25.3
  Int4 (PWR) w0.5: J3.10@-12.072,98.116 -12.072,106.306 -12.153,106.387 -12.153,106.865 -12.072,106.945 J3.10@-12.072,113.356
  Bottom Layer w0.09: U6.37@-19.913,111.468 -19.913,112.286 -19.565,112.634 -18.82,112.634 -18.622,112.832 -18.622,112.848 -18.513,112.957 -18.513,113.291 -17.639,114.165 -13.157,114.165 -12.347,113.356 J3.10@-12.072,113.356
B_B11: J3.11 U6.39 | length 25.7
  Int3 (Sign) w0.09: v1(-18.25,112.694) -18.214,112.658 -17.915,112.658 -17.769,112.512 -10.651,112.512 -9.807,113.356 J3.11@-9.532,113.356
  Int4 (PWR) w0.5: J3.11@-9.532,98.116 -9.532,106.881 -9.657,107.006 -9.657,107.484 -9.532,107.609 -9.532,112.073 -9.543,112.083 -9.543,112.561 -9.532,112.572 J3.11@-9.532,113.356
  Bottom Layer w0.09: U6.39@-18.313,111.468 -18.313,112.314 -18.268,112.359 -18.268,112.676 v1(-18.25,112.694)
B_B12: J3.12 U6.17 | length 28.8
  Int3 (Sign) w0.09: v1(-18.25,99.028) -16.468,99.028 -15.855,98.415 -15.855,98.095 -15.561,97.801 -15.561,97.768 -14.996,97.204 -12.836,97.204 -12.646,97.394 -8.958,97.394 -8.236,98.116 J3.12@-6.992,98.116
  Int4 (PWR) w0.5: J3.12@-6.992,98.116 -6.992,104.104 -6.998,104.11 -6.998,104.766 -6.992,104.771 J3.12@-6.992,113.356
  Bottom Layer w0.09: U6.17@-18.313,99.998 -18.313,99.091 v1(-18.25,99.028)
B_B13: J3.13 U6.15 | length 30.2
  Int3 (Sign) w0.09: v1(-15.933,97.647) -15.874,97.588 -15.649,97.588 -15.075,97.014 -8.808,97.014 -8.428,97.394 -5.449,97.394 -4.727,98.116 J3.13@-4.452,98.116
  Int4 (PWR) w0.5: J3.13@-4.452,98.116 -4.452,109.015 -4.561,109.124 -4.561,109.292 -4.561,109.77 -4.452,109.879 J3.13@-4.452,113.356
  Bottom Layer w0.09: U6.15@-16.713,99.998 -16.713,99.573 -15.913,98.773 -15.913,97.667 v1(-15.933,97.647)
B_B14: J3.14 U6.13 | length 30.7
  Int4 (PWR) w0.5: J3.14@-1.912,98.116 -1.751,98.277 -1.751,99.504 -1.912,99.666 J3.14@-1.912,113.356
  Bottom Layer w0.09: U6.13@-15.113,99.998 -15.113,99.091 -14.86,98.838 -14.038,98.838 -13.565,98.365 -13.565,98.312 -12.646,97.394 -8.958,97.394 -8.74,97.612 -7.784,97.612 -7.566,97.394 -2.909,97.394 -2.187,98.116 J3.14@-1.912,98.116
B_B15: J3.15 U6.11 | length 31.9
  Int3 (Sign) w0.09: v1(-11.495,101.748) -11.495,101.683 -11.7,101.479 -11.7,99.576 -11.423,99.299 -2.748,99.299 -2.664,99.383 -0.914,99.383 -0.341,98.809 -0.341,98.617 -0.232,98.508 -0.039,98.508 0.353,98.116 J3.15@0.628,98.116
  Int4 (PWR) w0.5: J3.15@0.628,98.116 0.815,98.303 0.815,99.478 0.628,99.666 J3.15@0.628,113.356
  Bottom Layer w0.09: U6.11@-12.578,101.733 -12.563,101.748 v1(-11.495,101.748)
B_B16: J3.16 U7.35 | length 15.2
  Int4 (PWR) w0.5: J3.16@3.168,98.116 J3.16@3.168,113.356
B_B17: J3.17 U7.37 | length 42.7
  Int3 (Sign) w0.09: J3.17@5.708,113.356 5.708,107.885 6.618,106.975 14.218,106.975 14.422,107.179 14.846,107.179 15.395,107.728 20.58,107.728 22.087,109.235 v1(22.087,112.455)
  Int4 (PWR) w0.5: J3.17@5.708,98.116 5.708,98.747 5.807,98.846 5.807,99.324 5.708,99.423 J3.17@5.708,113.356
  Bottom Layer w0.09: U7.37@22.087,111.483 v1(22.087,112.455)
B_B18: J3.18 U7.39 | length 33.1
  Int4 (PWR) w0.5: J3.18@8.248,98.116 J3.18@8.248,113.356
  Bottom Layer w0.09: J3.18@8.248,113.356 8.523,113.356 9.692,114.525 21.54,114.525 22.218,113.847 22.218,113.329 22.914,112.634 23.206,112.634 23.482,112.358 23.482,111.688 U7.39@23.687,111.483
B_B19: J3.19 U7.17 | length 34.6
  Int3 (Sign) w0.09: J3.19@10.788,98.116 10.788,100.29 11.984,101.486 23.636,101.486 23.746,101.376 23.746,99.378 v1(24.065,99.06)
  Int4 (PWR) w0.5: J3.19@10.788,98.116 10.788,99.117 10.673,99.232 10.673,99.71 10.788,99.824 J3.19@10.788,113.356
  Bottom Layer w0.09: U7.17@23.687,100.013 23.687,99.588 24.005,99.27 24.005,99.119 v1(24.065,99.06)
B_B20: J3.20 U7.15 | length 29.8
  Int3 (Sign) w0.09: J3.20@13.328,98.116 13.603,98.116 14.624,97.094 23.408,97.094 23.707,97.394 24.062,97.394 24.939,98.272 v1(24.939,98.85)
  Int4 (PWR) w0.5: J3.20@13.328,98.116 13.328,99.13 13.43,99.232 13.43,99.71 13.328,99.812 13.328,100.936 13.32,100.944 13.32,108.572 13.328,108.58 J3.20@13.328,113.356
  Bottom Layer w0.09: v1(24.939,98.85) 25.023,98.85 25.287,99.114 U7.15@25.287,100.013
B_B21: J3.21 U7.13 | length 29.3
  Int4 (PWR) w0.5: J3.21@15.868,98.116 J3.21@15.868,113.356
  Bottom Layer w0.09: J3.21@15.868,98.116 16.143,98.116 16.953,97.305 26.525,97.305 27.005,97.785 27.022,97.785 27.075,97.838 27.075,99.825 U7.13@26.887,100.013
B_B22: J3.22 U7.11 | length 34.5
  Int3 (Sign) w0.09: v1(19.85,102.234) 19.894,102.19 29.242,102.19 29.98,101.451 29.98,99.808 v1(29.955,99.783)
  Int4 (PWR) w0.5: J3.22@18.408,98.116 J3.22@18.408,113.356
  Bottom Layer w0.09: J3.22@18.408,98.116 18.408,100.422 19.85,101.864 v1(19.85,102.234) ; U7.11@29.422,101.748 29.805,101.748 30.01,101.543 30.01,99.837 v1(29.955,99.783)
B_B23: J3.23 U8.35 | length 32.5
  Int3 (Sign) w0.09: J3.23@20.948,113.356 20.948,114.115 21.328,114.495 33.27,114.495 v1(33.285,114.51)
  Int4 (PWR) w0.5: J3.23@20.948,98.116 J3.23@20.948,113.356
  Bottom Layer w0.09: v1(33.285,114.51) 33.79,114.51 34.645,113.655 34.645,111.64 U8.35@34.487,111.483
B_B24: J3.24 U8.37 | length 28.8
  Int2 (Sign) w0.09: J3.24@23.488,113.356 23.763,113.356 25.067,112.051 v1(35.91,112.051)
  Int4 (PWR) w0.5: J3.24@23.488,98.116 J3.24@23.488,113.356
  Bottom Layer w0.09: v1(35.91,112.051) 36.087,111.874 U8.37@36.087,111.483
B_B25: J3.25 U8.39 | length 31.7
  Int3 (Sign) w0.09: J3.25@26.028,113.356 26.028,111.57 27.613,109.984 30.471,109.984 30.558,109.897 36.981,109.897 37.63,110.546 37.63,112.036 v1(37.615,112.051)
  Int4 (PWR) w0.5: J3.25@26.028,98.116 J3.25@26.028,113.356
  Bottom Layer w0.09: v1(37.615,112.051) 37.687,111.978 U8.39@37.687,111.483
B_B26: J3.26 U8.17 | length 27.3
  Int3 (Sign) w0.09: J3.26@28.568,98.116 28.603,98.116 29.207,97.512 29.207,97.476 29.583,97.1 36.682,97.1 37.71,98.128 v1(37.71,99.217)
  Int4 (PWR) w0.5: J3.26@28.568,98.116 28.568,108.794 28.767,108.994 28.767,109.472 28.568,109.672 J3.26@28.568,113.356
  Bottom Layer w0.09: U8.17@37.687,100.013 37.71,99.99 v1(37.71,99.217)
B_B27: J3.27 U8.15 | length 24.7
  Int4 (PWR) w0.5: J3.27@31.108,98.116 31.131,98.139 31.131,99.904 31.108,99.927 J3.27@31.108,113.356
  Bottom Layer w0.09: J3.27@31.108,98.116 32.352,98.116 33.08,98.845 38.915,98.845 39.287,99.217 U8.15@39.287,100.013
B_B28: J3.28 U8.13 | length 25.4
  Int4 (PWR) w0.5: J3.28@33.648,98.116 33.648,104.148 33.493,104.303 33.493,106.282 33.626,106.415 33.626,113.334 J3.28@33.648,113.356
  Bottom Layer w0.09: J3.28@33.648,98.116 33.923,98.116 35.003,97.035 39.794,97.035 40.887,98.128 U8.13@40.887,100.013
B_B29: J3.29 U8.11 | length 25.7
  Int3 (Sign) w0.09: J3.29@36.188,98.116 36.188,100.561 37.384,101.757 v1(42.277,101.757)
  Int4 (PWR) w0.5: J3.29@36.188,98.116 36.188,105.609 36.487,105.909 36.487,113.079 36.21,113.356 J3.29@36.188,113.356
  Bottom Layer w0.09: v1(42.277,101.757) 43.412,101.757 U8.11@43.422,101.748
B_B33: J3.33 U9.35 | length 24.5
  Int3 (Sign) w0.09: v1(-36.03,95.04) -36.03,95.774 -35.474,96.33 -30.882,96.33 -30.127,95.576 J3.33@-29.852,95.576
  Int4 (PWR) w0.5: J3.33@-29.852,80.336 -29.852,86.506 -29.974,86.628 -29.974,87.106 -29.852,87.228 -29.852,89.076 -30.048,89.272 -30.048,89.75 -29.852,89.946 J3.33@-29.852,95.576
  Bottom Layer w0.09: v1(-36.03,95.04) -35.6,94.61 -35.6,93.948 U9.35@-35.395,93.743
B_B34: J3.34 U9.37 | length 25.1
  Int4 (PWR) w0.5: J3.34@-27.312,80.336 J3.34@-27.312,95.576
  Bottom Layer w0.09: U9.37@-33.795,93.743 -33.795,96.137 -33.113,96.82 -30.969,96.82 -30.793,96.995 -30.485,96.995 -30.309,96.82 -28.831,96.82 -27.587,95.576 J3.34@-27.312,95.576
B_B35: J3.35 U9.39 | length 24.3
  Int4 (PWR) w0.5: J3.35@-24.772,80.336 -24.772,86.112 -24.599,86.285 -24.599,88.669 -24.499,88.769 -24.499,89.774 -24.599,89.874 -24.599,91.714 -24.772,91.887 J3.35@-24.772,95.576
  Bottom Layer w0.09: U9.39@-32.195,93.743 -32.195,94.562 -31.903,94.854 -29.278,94.854 -29.052,95.08 -28.113,95.08 -27.886,94.854 -26.738,94.854 -26.617,94.976 -26.284,94.976 -25.684,95.576 J3.35@-24.772,95.576
B_B36: J3.36 U9.17 | length 28.6
  Int2 (Sign) w0.09: v1(-31.815,81.3) -31.815,81.274 -31.163,80.622 -31.163,79.695 -30.653,79.185 -23.115,79.185 -22.649,79.651 -22.649,79.919 J3.36@-22.232,80.336
  Int4 (PWR) w0.5: J3.36@-22.232,80.336 -22.232,88.674 -22.155,88.751 -22.155,88.973 -21.824,89.305 -21.824,90.476 -22.313,90.966 -22.313,92.137 -22.232,92.217 J3.36@-22.232,95.576
  Bottom Layer w0.09: U9.17@-32.195,82.273 -32.195,81.457 -32.097,81.359 -31.875,81.359 v1(-31.815,81.3)
B_B37: J3.37 U9.15 | length 28.1
  Int2 (Sign) w0.09: v1(-30.679,81.274) -21.874,81.274 -20.936,80.336 J3.37@-19.692,80.336
  Int4 (PWR) w0.5: J3.37@-19.692,80.336 -19.692,87.302 -19.25,87.744 -19.25,95.246 -19.58,95.576 J3.37@-19.692,95.576
  Bottom Layer w0.09: v1(-30.679,81.274) -30.679,82.189 U9.15@-30.595,82.273
B_B38: J3.38 U9.13 | length 29.2
  Int4 (PWR) w0.5: J3.38@-17.152,80.336 -17.152,87.522 -17.155,87.525 -17.155,94.434 -17.152,94.437 J3.38@-17.152,95.576
  Bottom Layer w0.09: U9.13@-28.995,82.273 -28.995,81.848 -28.44,81.292 -28.44,79.536 -28.089,79.185 -18.609,79.185 -17.875,79.919
B_B39: J3.39 U9.11 | length 29.8
  Int2 (Sign) w0.09: v1(-26.095,81.848) -16.399,81.848 -15.803,81.252 -15.798,81.252 -15.58,81.034 -15.58,81.028 -14.887,80.336 J3.39@-14.612,80.336
  Int4 (PWR) w0.5: J3.39@-14.612,80.336 -14.612,85.958 -14.458,86.113 -14.458,86.591 -14.612,86.746 J3.39@-14.612,95.576
  Bottom Layer w0.09: U9.11@-26.46,84.008 -26.46,82.213 v1(-26.095,81.848)
B_B40: J3.40 U10.35 | length 27.3
  Int3 (Sign) w0.09: v1(-21.395,94.183) -21.395,95.117 -21.053,95.459 -21.053,95.767 -19.994,96.826 -16.081,96.826 -15.553,96.298 -14.038,96.298 -13.316,95.576 J3.40@-12.072,95.576
  Int4 (PWR) w0.5: J3.40@-12.072,80.336 J3.40@-12.072,95.576
  Bottom Layer w0.09: U10.35@-21.395,93.758 v1(-21.395,94.183)
B_B41: J3.41 U10.37 | length 26.9
  Int3 (Sign) w0.09: v1(-19.827,94.195) -19.455,93.823 -11.56,93.823 -9.807,95.576 J3.41@-9.532,95.576
  Int4 (PWR) w0.5: J3.41@-9.532,80.336 J3.41@-9.532,95.576
  Bottom Layer w0.09: v1(-19.827,94.195) -19.827,93.79 U10.37@-19.795,93.758
B_B42: J3.42 U10.39 | length 29.4
  Int2 (Sign) w0.09: v1(-18.195,94.318) -18.195,95.829 -17.726,96.298 -14.038,96.298 -13.62,95.88 -13.274,95.88 -12.856,96.298 -7.989,96.298 -7.267,95.576 J3.42@-6.992,95.576
  Int4 (PWR) w0.5: J3.42@-6.992,80.336 -6.992,93.941 -6.995,93.944 -6.995,94.422 -6.992,94.425 J3.42@-6.992,95.576
  Bottom Layer w0.09: U10.39@-18.195,93.758 v1(-18.195,94.318)
B_B43: J3.43 U10.17 | length 31.9
  Int2 (Sign) w0.09: v1(-18.36,80.715) -18.36,80.247 -17.688,79.575 -5.488,79.575 -4.727,80.336 J3.43@-4.452,80.336
  Int4 (PWR) w0.5: J3.43@-4.452,80.336 -4.452,86.428 -4.528,86.503 -4.528,92.318 -4.452,92.394 J3.43@-4.452,95.576
  Bottom Layer w0.09: v1(-18.36,80.715) -18.195,80.88 U10.17@-18.195,82.288
B_B44: J3.44 U10.15 | length 32.4
  Int3 (Sign) w0.09: v1(-15.952,80.88) -15.952,80.379 -14.743,79.17 -4.11,79.17 -2.944,80.336 J3.44@-1.912,80.336
  Int4 (PWR) w0.5: J3.44@-1.912,80.336 J3.44@-1.912,95.576
  Bottom Layer w0.09: U10.15@-16.595,82.288 -16.595,81.523 v1(-15.952,80.88)
B_B45: J3.45 U10.13 | length 33.7
  Int4 (PWR) w0.5: J3.45@0.628,80.336 J3.45@0.628,95.576
  Bottom Layer w0.09: v1(-15.189,81.252) -15.105,81.252 -14.997,81.36 -14.995,81.36 ; U10.13@-14.995,82.288 -14.995,81.36 ; J3.45@0.628,80.336 -0.439,80.336 -1.965,78.81 -11.843,78.81 -13.342,80.31 -13.342,80.362 -14.038,81.058 -14.61,81.058 -14.803,81.252 -14.887,81.252 -14.995,81.36
B_B46: J3.46 U10.11 | length 35.3
  Int3 (Sign) w0.09: v1(-13.638,84.26) -0.11,84.26 3.168,80.982 J3.46@3.168,80.336
  Int4 (PWR) w0.5: J3.46@3.168,80.336 J3.46@3.168,95.576
  Bottom Layer w0.09: v1(-13.638,84.26) -13.401,84.023 U10.11@-12.46,84.023
B_B47: J3.47 U11.35 | length 32.3
  Int3 (Sign) w0.09: J3.47@5.708,95.576 6.952,95.576 7.674,96.298 13.902,96.298 13.969,96.231 15.172,96.231 15.239,96.298 16.469,96.298 16.536,96.231 17.767,96.231 17.834,96.298 19.074,96.298 v1(19.796,95.576)
  Int4 (PWR) w0.5: J3.47@5.708,80.336 5.708,91.329 5.839,91.461 5.839,91.939 5.708,92.071 J3.47@5.708,95.576
  Bottom Layer w0.09: v1(19.796,95.576) 19.796,95.492 19.951,95.337 19.951,95.277 20.605,94.623 U11.35@20.605,93.758
B_B48: J3.48 U11.37 | length 30.5
  Int2 (Sign) w0.09: J3.48@8.248,95.576 8.523,95.576 9.398,94.7 v1(22.155,94.7)
  Int4 (PWR) w0.5: J3.48@8.248,80.336 J3.48@8.248,95.576
  Bottom Layer w0.09: v1(22.155,94.7) 22.205,94.651 U11.37@22.205,93.758
B_B49: J3.49 U11.39 | length 32.3
  Int4 (PWR) w0.5: J3.49@10.788,80.336 J3.49@10.788,95.576
  Bottom Layer w0.09: J3.49@10.788,95.576 11.063,95.576 12.017,96.53 24.294,96.53 24.485,96.34 24.485,95.277 23.805,94.597 U11.39@23.805,93.758
B_B50: J3.50 U11.17 | length 15.3
  Int4 (PWR) w0.5: J3.50@13.328,80.336 13.221,80.443 13.221,84.083 13.202,84.102 13.202,84.58 13.221,84.598 13.221,95.469 J3.50@13.328,95.576
B_B51: J3.51 U11.15 | length 26.3
  Int4 (PWR) w0.5: J3.51@15.868,80.336 15.868,83.479 15.578,83.769 15.578,84.247 15.868,84.537 J3.51@15.868,95.576
  Bottom Layer w0.09: J3.51@15.868,80.336 16.143,80.336 16.94,81.133 24.983,81.133 25.2,81.35 25.2,82.083 U11.15@25.405,82.288
B_B52: J3.52 U11.13 | length 25.5
  Int2 (Sign) w0.09: J3.52@18.408,80.336 18.683,80.336 19.48,81.133 v1(27.094,81.133)
  Int4 (PWR) w0.5: J3.52@18.408,80.336 18.408,94.026 18.394,94.04 18.394,95.562 J3.52@18.408,95.576
  Bottom Layer w0.09: U11.13@27.005,82.288 27.094,82.199 v1(27.094,81.133)
B_B53: J3.53 U11.11 | length 25.8
  Int3 (Sign) w0.09: J3.53@20.948,80.336 24.65,84.039 27.079,84.039 v1(27.421,84.38)
  Int4 (PWR) w0.5: J3.53@20.948,80.336 20.948,93.718 20.828,93.838 20.828,94.316 20.948,94.436 J3.53@20.948,95.576
  Bottom Layer w0.09: v1(27.421,84.38) 27.762,84.039 29.524,84.039 U11.11@29.54,84.023
B_B54: J3.54 U12.35 | length 30.7
  Int3 (Sign) w0.09: J3.54@23.488,95.576 23.488,94.477 25.732,92.233 29.906,92.233 30.287,92.614 32.332,92.614 32.476,92.47 34.27,92.47 34.323,92.417 34.323,92.134 34.197,92.134 v1(34.143,92.079)
  Int4 (PWR) w0.5: J3.54@23.488,80.336 J3.54@23.488,95.576
  Bottom Layer w0.09: v1(34.143,92.079) 34.227,92.079 34.605,92.457 U12.35@34.605,93.758
B_B55: J3.55 U12.37 | length 28
  Int2 (Sign) w0.09: J3.55@26.028,95.576 26.49,95.576 27.212,96.298 34.469,96.298 34.892,95.875 34.892,95.576 35.772,94.695 36.529,94.695 v1(36.536,94.702)
  Int4 (PWR) w0.5: J3.55@26.028,80.336 J3.55@26.028,95.576
  Bottom Layer w0.09: U12.37@36.205,93.758 36.41,93.963 36.41,94.492 36.536,94.618 v1(36.536,94.702)
B_B56: J3.56 U12.39 | length 26.9
  Int3 (Sign) w0.09: J3.56@28.568,95.576 29.812,95.576 30.534,96.298 36.762,96.298 37.71,95.35 v1(37.71,94.695)
  Int4 (PWR) w0.5: J3.56@28.568,80.336 28.568,88.343 28.851,88.626 28.851,89.104 28.568,89.387 J3.56@28.568,95.576
  Bottom Layer w0.09: v1(37.71,94.695) 37.805,94.6 U12.39@37.805,93.758
B_B57: J3.57 U12.17 | length 26.3
  Int3 (Sign) w0.09: J3.57@31.108,80.336 31.108,81.659 33.596,84.148 37.473,84.148 37.512,84.108 37.657,84.108 v1(37.716,84.049)
  Int4 (PWR) w0.5: J3.57@31.108,80.336 31.108,86.075 31.119,86.086 31.119,86.564 31.108,86.575 31.108,88.517 31.217,88.626 31.217,89.104 31.455,89.342 31.455,93.101 31.108,93.448 J3.57@31.108,95.576
  Bottom Layer w0.09: v1(37.716,84.049) 37.716,82.376 U12.17@37.805,82.288